# Altium PCB Flight_Controller_2.PcbDoc
Units mm, origin at the board's own origin, x right, y up, seen from the top; angles counter-clockwise.
Board outline 36 x 36 mm, 2 copper layers (Top Layer, Bottom Layer); 41 components, 37 nets, 192 pads, 76 vias.
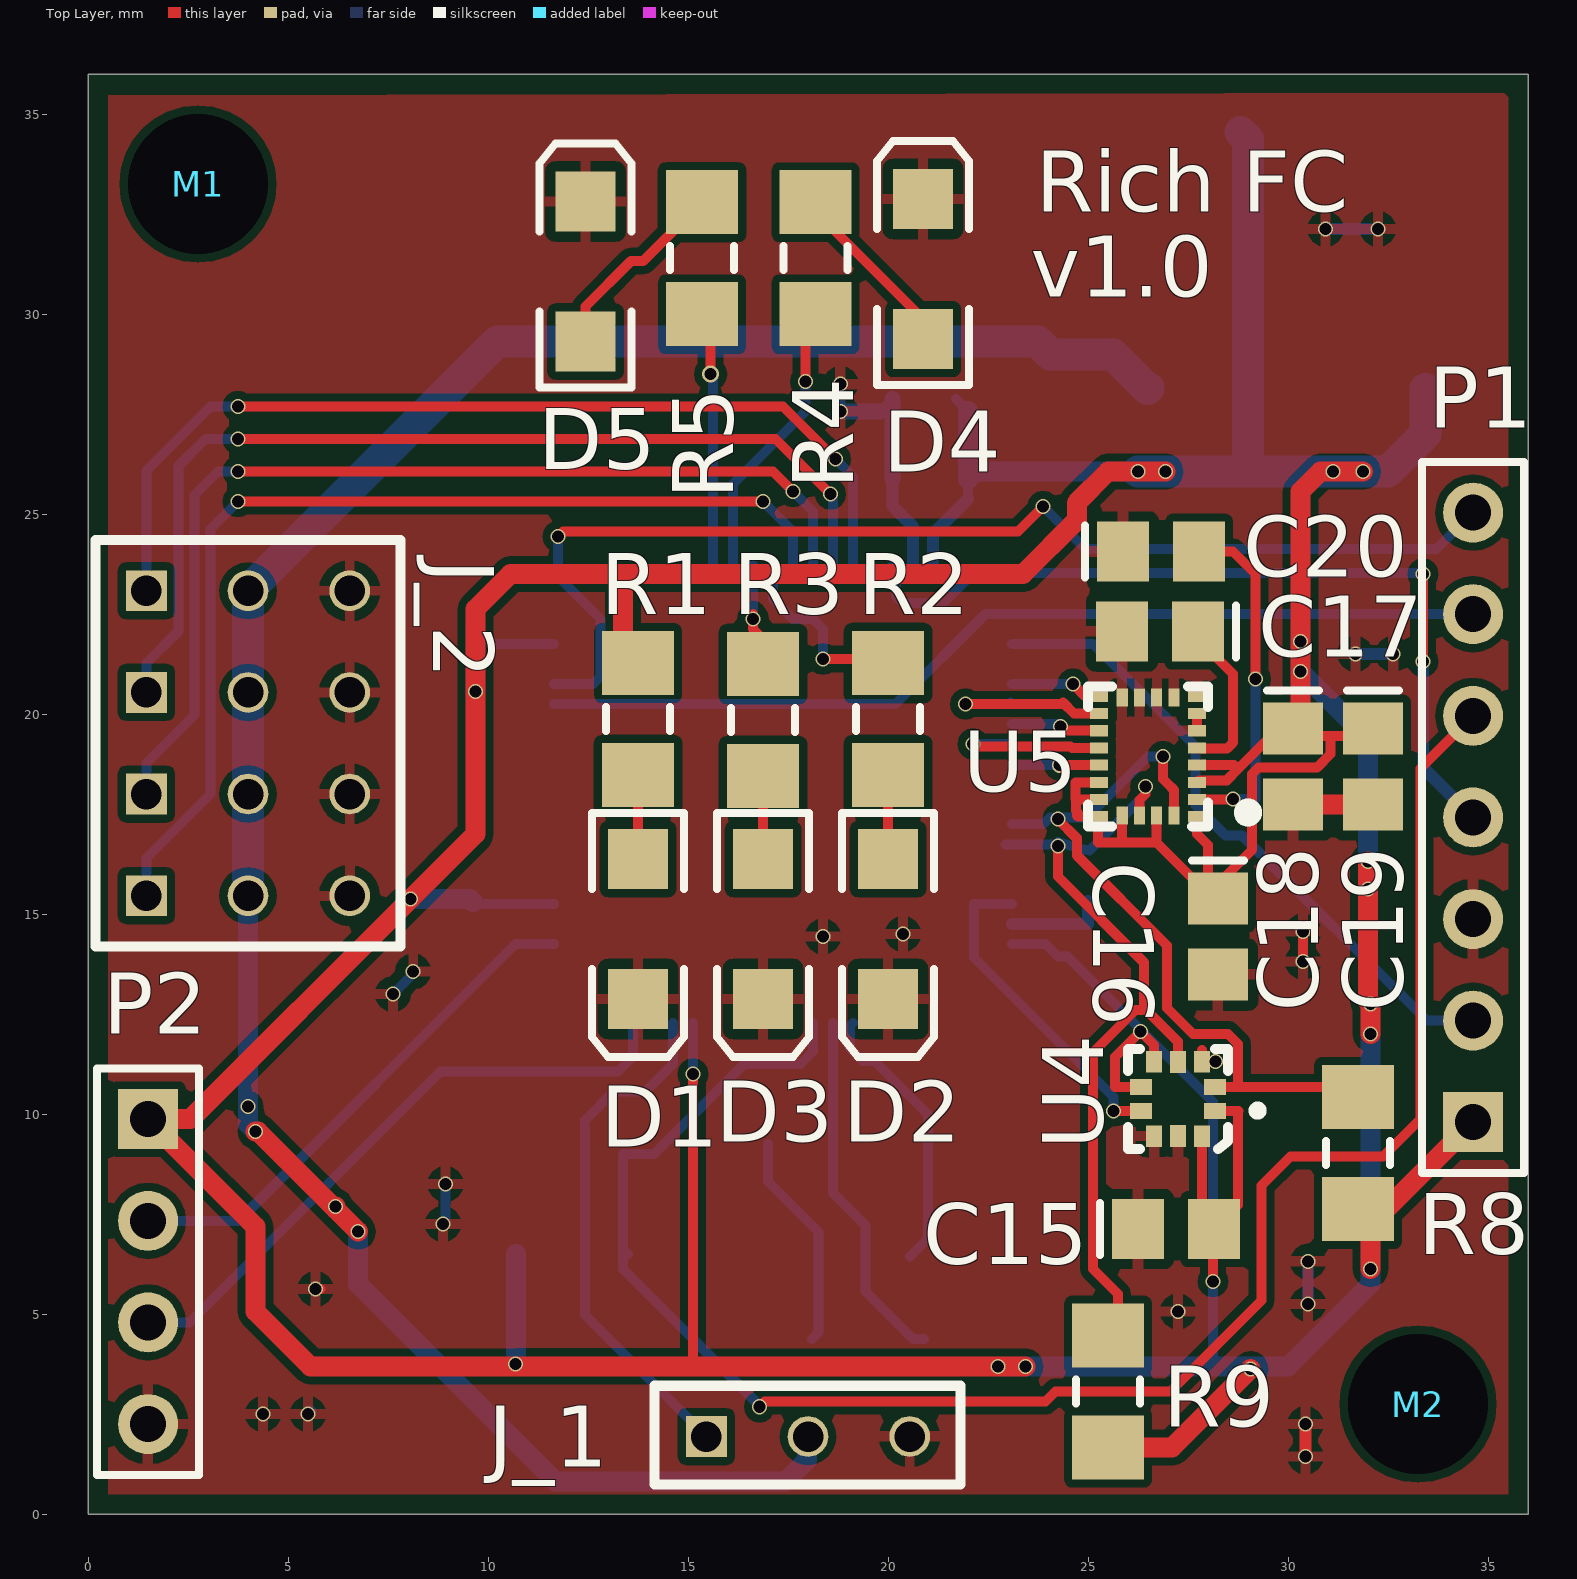
[diagram p0: Top Layer view]
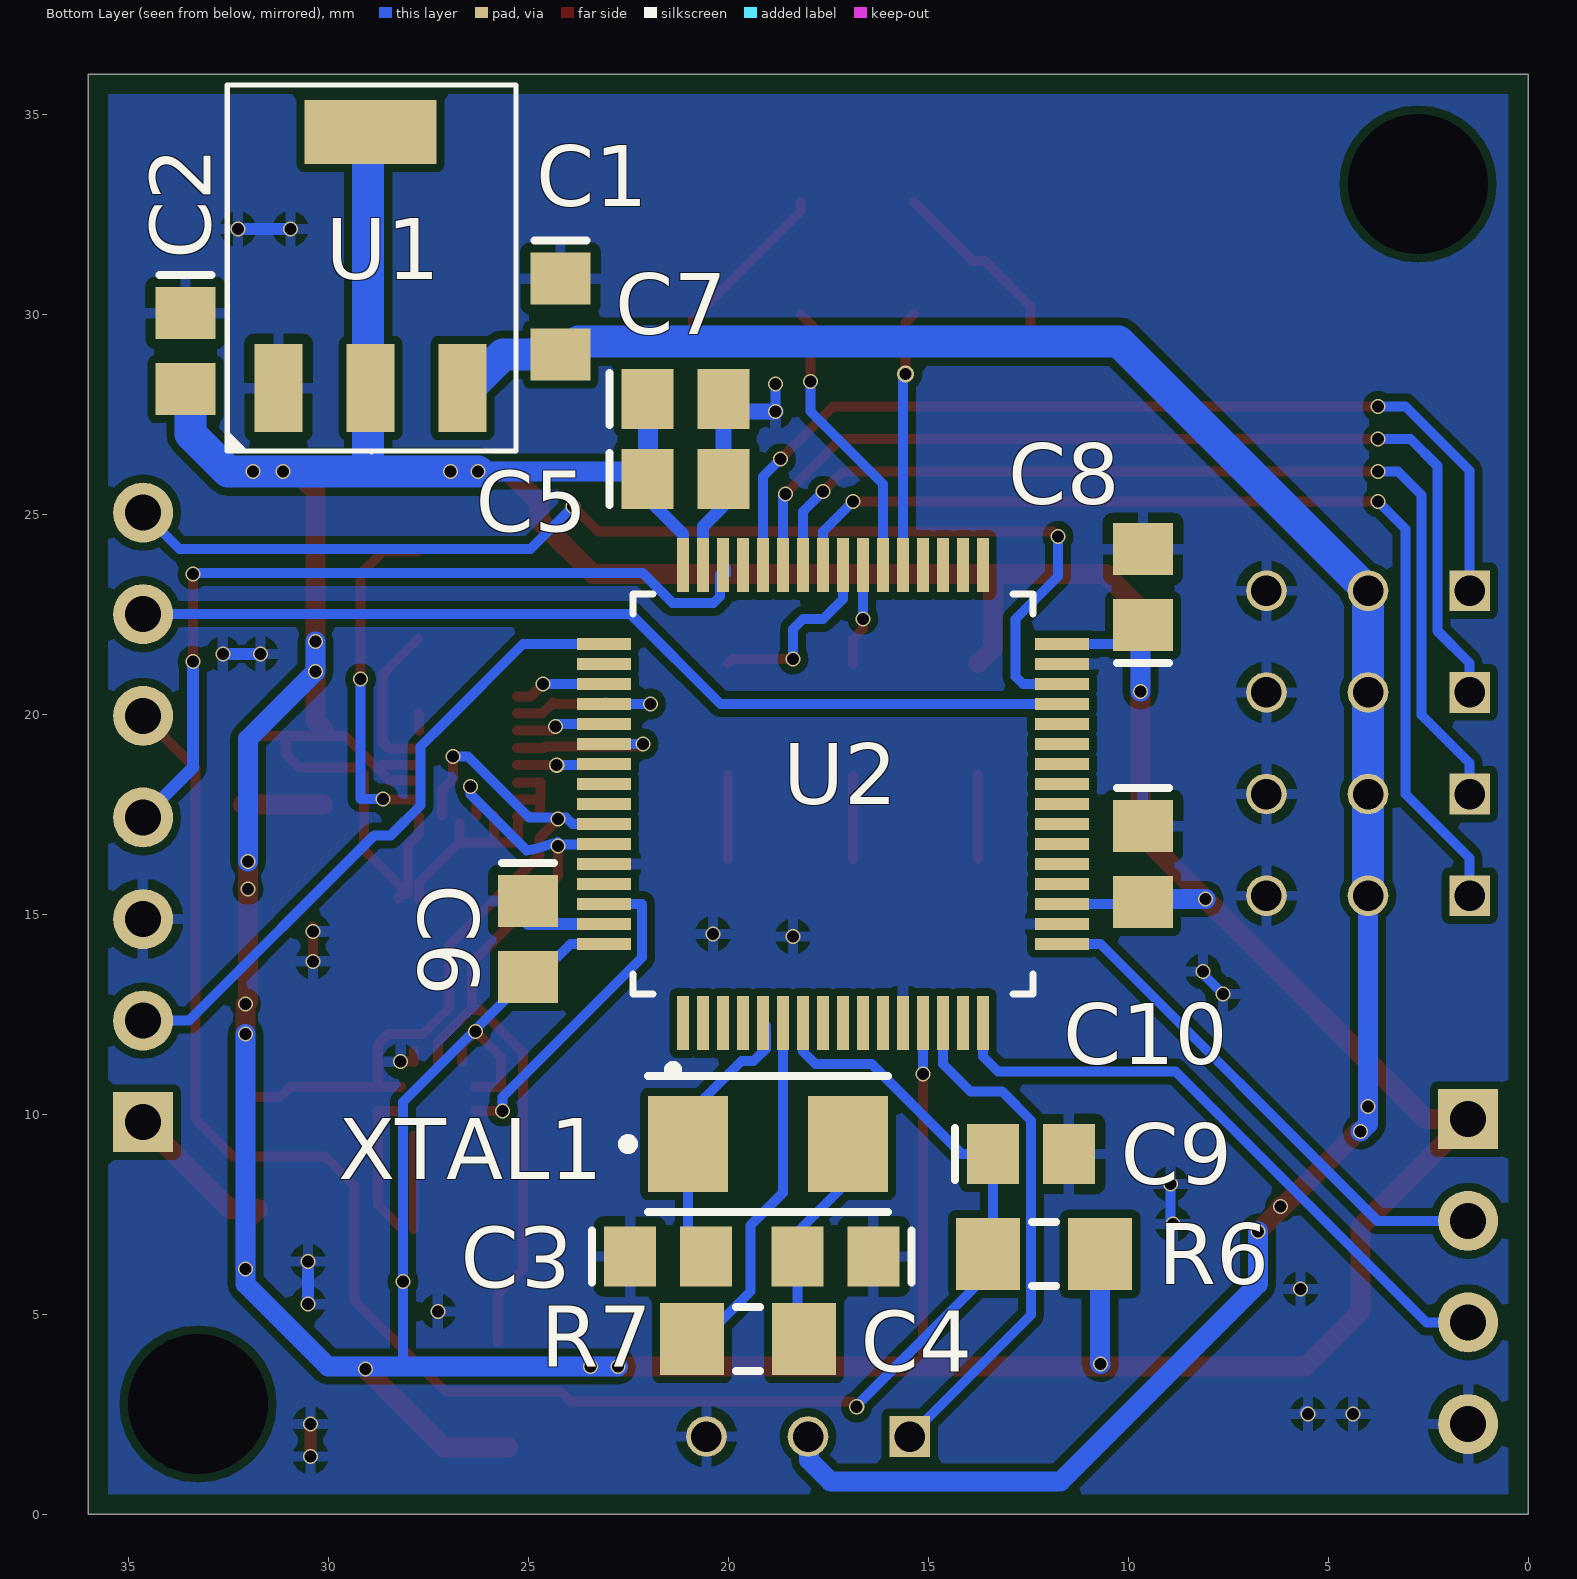
[diagram p1: Bottom Layer view, seen from below]
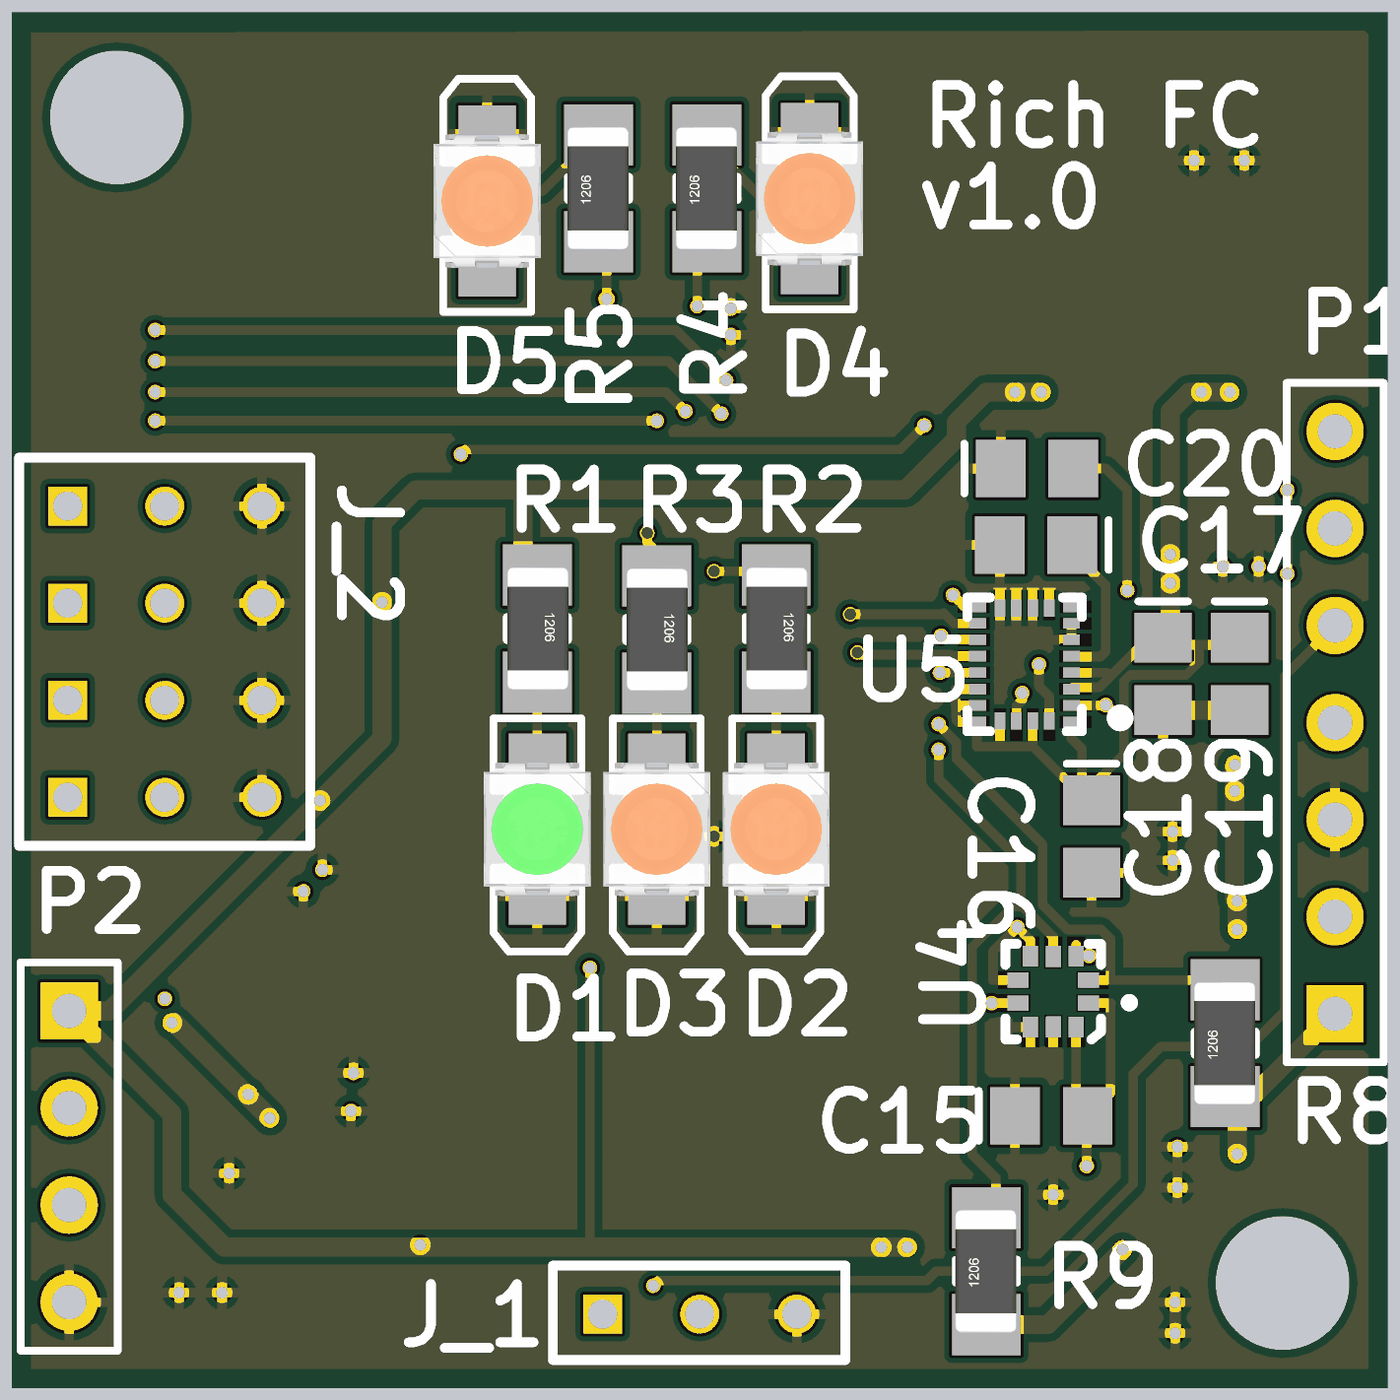
[diagram p2: 3D render of the assembled board from above, using the file's embedded part models]

## Layer stack, top to bottom
Top Solder: solder mask 0.0102, Solder Resist, Dk 3.5
Top Layer: signal copper 0.0356
Dielectric 1: dielectric 0.32, FR-4, Dk 4.8
Bottom Layer: signal copper 0.0356
Bottom Solder: solder mask 0.0102, Solder Resist, Dk 3.5

## Board outline
0,0 36,0 36,36 0,36

## Design rules (kind name [scope] priority, off if disabled: settings)
BoardOutlineClearance [(OnLayer('Top Layer') OR OnLayer('Bottom Layer') OR OnLayer('Multi-Layer'))] p1: gap=0.381 ignorepadtopadclearanceinfootprint=FALSE
Clearance Clearance_Polygon [InPolygon and InNet('GND')] p1: gap=0.2 ignorepadtopadclearanceinfootprint=FALSE
Clearance [All] p2: gap=0.152 ignorepadtopadclearanceinfootprint=FALSE except(0.254: Fill-Fill Fill-Poly Fill-Region Poly-Poly Poly-Region Region-Region)
HoleSize [All] p1: absolutevalues=TRUE maxlimit=4 minlimit=0.025 maxpercent=80.000 minpercent=20.000
MinimumSolderMaskSliver [All] p1: minsoldermaskwidth=0.102
PolygonConnect [All] p1: connectstyle=Relief reliefconductorwidth=0.254 reliefentries=4 polygonreliefangle="90 Angle" airgapwidth=0.254
RoutingVias [All] p1: holewidth=0.305 width=0.381 viastyle="Through Hole" minholewidth=0.254 minwidth=0.381 maxholewidth=0.6 maxwidth=1
SolderMaskExpansion [All] p1: expansion=0.08
Width [All] p1: maxlimit=1 minlimit=0.25 preferedwidth=0.25
28 further rules are at their usual default settings.

## Components (designator, comment, footprint, x,y, rotation, side; value= is the part's Value field where it differs from the comment)
C1 "Cap" C0805 24.187,29.937 r270 bottom
C2 "Cap" C0805 33.562,29.075 r270 bottom value=10uF
C3 "Cap" C0805 21.5,6.438 r180 bottom value=8pF
C4 "Cap" C0805 17.313,6.438 r0 bottom value=8pF
C5 "Cap" C0805 21.062,25.875 r180 bottom value=100nF
C6 "Cap" C0805 25,14.375 r270 bottom value=100nF
C7 "Cap" C0805 21.062,27.875 r180 bottom value=4.7uF
C8 "Cap" C0805 9.625,23.175 r90 bottom value=100nF
C9 "Cap" C0805 12.425,9 r180 bottom value=100nF
C10 "Cap" C0805 9.625,16.25 r270 bottom value=100nF
C15 "Cap" C0805 27.2,7.125 r0 top value=100nF
C16 "Cap" C0805 28.25,14.437 r270 top
C17 "Cap" C0805 26.8,22.062 r180 top
C18 "Cap" C0805 30.125,18.687 r270 top
C19 "Cap" C0805 32.125,18.687 r270 top value=10uF
C20 "Cap" C0805 26.825,24.062 r0 top value=100nF
D1 "OVS5MGBCR4" OVS5MGBCR4 13.75,14.625 r270 top
D2 "OVS5MRBCR4" OVS5MRBCR4 20,14.625 r270 top
D3 "OVS5MRBCR4" OVS5MRBCR4 16.875,14.625 r270 top
D4 "OVS5MRBCR4" OVS5MRBCR4 20.875,31.125 r90 top
D5 "OVS5MRBCR4" OVS5MRBCR4 12.438,31.062 r90 top
J_1 "Header_3x1" Header_3x1 15.46,1.937 r90 top
J_2 "Header 4x3" Header_4x3 4,18 r0 top
M1 "M3_Mounting_Hole" M3_Mounting_Hole 2.75,33.25 r0 top
M2 "M3_Mounting_Hole" M3_Mounting_Hole 33.25,2.75 r0 top
P1 "Header 7" HDR1X7 34.625,9.795 r90 top
P2 "Header 4" HDR1X4 1.5,9.87 r270 top
R1 "Res" 3216[1206] 13.75,19.875 r270 top value=1K
R2 "Res" 3216[1206] 20,19.875 r270 top value=1K
R3 "Res" 3216[1206] 16.875,19.85 r270 top value=1K
R4 "Res" 3216[1206] 18.187,31.395 r90 top
R5 "Res" 3216[1206] 15.35,31.395 r90 top value=1K
R6 "Res" 3216[1206] 12.1,6.5 r180 bottom
R7 "Res" 3216[1206] 19.5,4.375 r180 bottom value=640
R8 "Res" 3216[1206] 31.75,9.025 r90 top value=10k
R9 "Res" 3216[1206] 25.5,3.063 r90 top value=10k
U1 "U_AZ1117EH-3.3TRG1" SOT223 28.937,31.125 r180 bottom
U2 "STM32F072RB_PINOUT" "LQFP-64 10X10MM" 17.375,18 r180 bottom
U4 "LPS25HB" "HLGA-10L - NARROW" 27.25,10.375 r180 top
U5 "LSM9DS1" "LGA-24 - NARROW" 26.5,18.937 r270 top
XTAL1 "NX5032GA 32MHz" NX5032GA 19,9.25 r180 bottom

## Footprints (in the part's own frame and the unit in brackets; to place one, negate y for a bottom-side part, rotate by r counter-clockwise, add the part's x,y. Pads: shape width x height; smd on the part's side, far side on the other; paste and mask are expansions set on the pad)
3216[1206] [mm] "Chip Resistor; Body 3.2 x 1.6 mm (LxW typ)"
  rect 1.6x1.8 smd: 1(-1.4,0) 2(1.4,0)
  silkscreen extent -0.3,-0.8 0.3,0.8, body extent -1.6,-0.79 1.6,0.81, height 1
C0805 [mm] "Chip Capacitor; Body 2.0 x 1.2 mm (LxW typ)"
  rect 1.3x1.5 smd: 1(-0.95,0) 2(0.95,0)
  silkscreen extent -1.9,-0.65 -1.9,0.65
HDR1X4 [mm] "Connector; Header; 4 Position"
  rect 1.5x1.5 hole 0.9: 1(0,0)
  round 1.5 hole 0.9: 2(2.54,0) 3(5.08,0) 4(7.62,0)
  silkscreen extent -1.27,-1.27 8.89,1.27
HDR1X7 [mm] "Connector; Header; 7 Position"
  rect 1.5x1.5 hole 0.9: 1(0,0)
  round 1.5 hole 0.9: 2(2.54,0) 3(5.08,0) 4(7.62,0) 5(10.16,0) 6(12.7,0) 7(15.24,0)
  silkscreen extent -1.27,-1.27 16.51,1.27
Header_3x1 [mil]
  rect 40x40 hole 30: 1(0,0)
  round 40 hole 30: 2(0,-100) 3(0,-200)
  silkscreen extent -47,-250 50,51
Header_4x3 [mil]
  rect 40x40 hole 30: 1(-100,200) 2(-100,100) 3(-100,0) 4(-100,-100)
  round 40 hole 30: 5(0,200) 6(0,100) 7(0,0) 8(0,-100) 9(100,200) 10(100,100) 11(100,0) 12(100,-100)
  silkscreen extent -150,-150 150,250
"HLGA-10L - NARROW" [mm]
  rect 0.55x0.4 smd mask+0: 1(-0.92,0.3) 2(-0.92,-0.3) 6(0.92,-0.3) 7(0.92,0.3)
  rect 0.4x0.54 smd mask+0: 3(-0.6,-0.93) 5(0.6,-0.93) 8(0.6,0.93) 10(-0.6,0.93)
  rect 0.4x0.55 smd mask+0: 4(0,-0.92) 9(0,0.92)
  silkscreen extent -2.09,-1.25 1.25,1.25, body extent -1.25,-1.25 1.25,1.25, height 1
"LGA-24 - NARROW" [mm]
  rect 0.278x0.45 smd mask+0: 1(1.505,1.225) 6(1.505,-1.225) 7(1.075,-1.225) 8(0.645,-1.225) 9(0.215,-1.225) 10(-0.215,-1.225) 11(-0.645,-1.225) 12(-1.075,-1.225) 13(-1.505,-1.225) 18(-1.505,1.225) 19(-1.075,1.225) 20(-0.645,1.225) 21(-0.215,1.225) 22(0.215,1.225) 23(0.645,1.225) 24(1.075,1.225)
  rect 0.45x0.278 smd mask+0: 2(1.475,0.645) 3(1.475,0.215) 4(1.475,-0.215) 5(1.475,-0.645) 14(-1.475,-0.645) 15(-1.475,-0.215) 16(-1.475,0.215) 17(-1.475,0.645)
  silkscreen extent -1.75,-1.5 1.75,2.6, body extent -1.75,-1.5 1.75,1.5, height 1
"LQFP-64 10X10MM" [mm] "LQFP-64 10x10mm 0.5mm pitch"
  rect 0.29x1.35 smd mask+0.054: 1(-3.75,-5.725) 2(-3.25,-5.725) 3(-2.75,-5.725) 4(-2.25,-5.725) 5(-1.75,-5.725) 6(-1.25,-5.725) 7(-0.75,-5.725) 8(-0.25,-5.725) 9(0.25,-5.725) 10(0.75,-5.725) 11(1.25,-5.725) 12(1.75,-5.725) 13(2.25,-5.725) 14(2.75,-5.725) 15(3.25,-5.725) 16(3.75,-5.725) 33(3.75,5.725) 34(3.25,5.725) 35(2.75,5.725) 36(2.25,5.725) 37(1.75,5.725) 38(1.25,5.725) 39(0.75,5.725) 40(0.25,5.725) 41(-0.25,5.725) 42(-0.75,5.725) 43(-1.25,5.725) 44(-1.75,5.725) 45(-2.25,5.725) 46(-2.75,5.725) 47(-3.25,5.725) 48(-3.75,5.725)
  rect 1.35x0.29 smd mask+0.054: 17(5.725,-3.75) 18(5.725,-3.25) 19(5.725,-2.75) 20(5.725,-2.25) 21(5.725,-1.75) 22(5.725,-1.25) 23(5.725,-0.75) 24(5.725,-0.25) 25(5.725,0.25) 26(5.725,0.75) 27(5.725,1.25) 28(5.725,1.75) 29(5.725,2.25) 30(5.725,2.75) 31(5.725,3.25) 32(5.725,3.75) 49(-5.725,3.75) 50(-5.725,3.25) 51(-5.725,2.75) 52(-5.725,2.25) 53(-5.725,1.75) 54(-5.725,1.25) 55(-5.725,0.75) 56(-5.725,0.25) 57(-5.725,-0.25) 58(-5.725,-0.75) 59(-5.725,-1.25) 60(-5.725,-1.75) 61(-5.725,-2.25) 62(-5.725,-2.75) 63(-5.725,-3.25) 64(-5.725,-3.75)
  silkscreen extent -5,-7 5,5, body extent -6,-6 6,6, height 1.55
M3_Mounting_Hole [mm]
  round 1 hole 3.5 unplated mask+0: 0(0,0)
  body extent -3,-3 3,3, height 3
NX5032GA [mm] "NX5032GA Crystal Oscillator"
  rect 2x2.4 smd: 1(-2,0) 2(2,0)
  silkscreen extent -3.63,-1.7 3,1.7, body extent -2.51,-1.6 2.51,1.6, height 1.3
OVS5MGBCR4 [mm] "SMT LED; 2 Flat Leads; GREEN"
  rect 1.5x1.5 smd: 1(-1.75,0) 2(1.75,0)
  silkscreen extent -2.9,-1.15 3.2,1.15, body extent -1.75,-1.4 1.75,1.4, height 1.6
OVS5MRBCR4 [mm] "SMT LED; 2 Flat Leads; RED"
  rect 1.5x1.5 smd: 1(-1.75,0) 2(1.75,0)
  silkscreen extent -2.9,-1.15 3.2,1.15, body extent -1.75,-1.4 1.75,1.4, height 1.6
SOT223 [mm]
  rect 1.2x2.2 smd: 1(-2.3,-2.975) 2(0,-2.975) 3(2.3,-2.975)
  rect 3.3x1.6 smd: 4(0,3.425)
  silkscreen extent -3.58,-4.57 3.63,4.6, body extent -3.33,-2.93 3.43,3.86, height 1.3

## Part data
C1 C2 C3 C4 C5 C6 C7 C8 C9 C10 C15 C16 C17 C18 C19 C20: "Capacitor"
  C2 C3 C4 C5 C6 C7 C8 C9 C10 C15 C19 C20: LatestRevisionDate=17-Jul-2002, LatestRevisionNote="Re-released for DXP Platform.", PackageReference=C1206, Published=8-Jun-2000, Publisher="Altium Limited"
D1: "Typical GREEN LED", Colour=GREEN, PackageDocument=Feb-2002, Supplier Part Number 1=365-1545-1-ND, LatestRevisionDate=17-Jul-2002, LatestRevisionNote="Re-released for DXP Platform.", PackageReference=3.2X1.6X1.1, Published=8-Jun-2000, Publisher="Altium Limited", Supplier 1=Digi-Key
D2 D3 D4 D5: "Typical RED LED", Colour=RED, PackageDocument=Feb-2002, Supplier Part Number 1=365-1546-1-ND, LatestRevisionDate=17-Jul-2002, LatestRevisionNote="Re-released for DXP Platform.", PackageReference=3.2X1.6X1.1, Published=8-Jun-2000, Publisher="Altium Limited", Supplier 1=Digi-Key
J_2: library part Header_4x3
P1: "Header, 7-Pin", LatestRevisionDate=17-Jul-2002, LatestRevisionNote="Re-released for DXP Platform.", Publisher="Altium Limited"
P2: "Header, 4-Pin", LatestRevisionDate=17-Jul-2002, LatestRevisionNote="Re-released for DXP Platform.", Publisher="Altium Limited"
R1 R2 R3 R4 R5 R6 R7 R8 R9: "Surface Mount Resistor"
  R1 R2 R3 R5 R7 R8 R9: LatestRevisionDate=17-Jul-2002, LatestRevisionNote="Re-released for DXP Platform.", PackageReference=AXIAL-0.5, Published=8-Jun-2000, Publisher="Altium Limited"
U1: "IC LDO 3.3V 1A", Current - Limit (Min)=-, Current - Output=1A, Manufacturer="Diodes Incorporated", Manufacturer Part Number=AZ1117EH-3.3TRG1, Operating Temperature="-40°C ~ 125°C", Package / Case="TO-261-4, TO-261AA", Supplier Device Package=SOT-223, Supplier Part Number 1=AZ1117EH-3.3TRG1DICT-ND, Voltage - Dropout (Typical)="1.1V @ 1A", Voltage - Input="Up to 13V", Voltage - Output=3.3V, Category="Integrated Circuits (ICs)", ComponentLink1Description=http://www.diodes.com/_files/datasheets/AZ1117E.pdf, ComponentLink1URL=http://www.diodes.com/_files/datasheets/AZ1117E.pdf, Mounting Type="Surface Mount", Number of Regulators=1, Packaging="Cut Tape (CT)", Pricing="1=0.61, 10=0.456, 100=0.2578, 500=0.1709, 1000=0.13108 (CAD)", Regulator Topology="Positive Fixed", RoHS="RoHS Compliant", Stock 1=13427, Supplier 1=Digi-Key
U2: "64-LQFP - Pinout Representation", Supplier Part Number 1=497-14644-ND, Supplier 1=Digi-Key
U4: Manufacturer=STMicroelectronics, Manufacturer Part Number=LPS25HBTR, Max Operating Temperature=105, Max Supply Voltage=3.6, Min Operating Temperature=-30, Min Supply Voltage=1.7, Operating Pressure=18.27, Supplier Part Number 1=497-15070-6-ND, ComponentLink1Description=http://www.farnell.com/datasheets/1992925.pdf, ComponentLink1URL=http://www.farnell.com/datasheets/1992925.pdf, ComponentLink2Description=http://www.st.com/st-web-ui/static/active/en/resource/technical/document/datasheet/DM00141379.pdf, ComponentLink2URL=http://www.st.com/st-web-ui/static/active/en/resource/technical/document/datasheet/DM00141379.pdf, Contact Plating=Nickel,Gold, Lead Free="Lead Free", Max Pressure=290.08, Mount="Surface Mount", Number of Pins=10, Port Style="No Port", Pricing 1="1=3.25, 10=2.917, 100=2.3901 (USD)", REACH SVHC="No SVHC", Stock 1=0, Supplier 1=Digikey, Termination=Solder
U5: Case/Package=LGA, Manufacturer=STMicroelectronics, Manufacturer Part Number=LSM9DS1TR, Max Operating Temperature=85, Max Supply Voltage=3.6, Min Operating Temperature=-40, Min Supply Voltage=1.9, Supplier Part Number 1=497-14946-6-ND, ComponentLink1Description=http://www.farnell.com/datasheets/2028150.pdf, ComponentLink1URL=http://www.farnell.com/datasheets/2028150.pdf, Lead Free="Lead Free", Number of Pins=24, Packaging="Cut Tape", Pricing 1="1=6.4, 10=5.751, 100=4.7119 (USD)", REACH SVHC="No SVHC", Stock 1=6141, Supplier 1=Digikey
XTAL1: library part NX5032GA, "NX5032GA"

## Via types
v1: diameter 0.381, hole 0.305, Top Layer to Bottom Layer, 75 vias
v2: diameter 0.432, hole 0.305, Top Layer to Bottom Layer, 1 vias

## Nets (pads, with @x,y where several pads share a name; then routed paths per layer and width w, separated by ;. In a path a pad name is that pad's centre, name@x,y a point inside that pad or via, vN(x,y) a via of type N, cw(c..) or ccw(c..) an arc to the next point about the centre after c; other vN are vias at no path point)
5V: C1.2 J_1.2 J_2.5 J_2.6 J_2.7 J_2.8 U1.3 | length 57.9
  Top Layer w0.5: v1(4.187,9.563) 4.25,9.563 v1@6.188,7.625 ; v1(6.188,7.688) v1@6.188,7.625 ; v1(6.75,7.063) v1@6.188,7.625
  Bottom Layer w0.5: J_2.8 v1(4,10.188) 4,9.75 v1(4.187,9.563) ; v1(6.75,7.063) 6.75,5.75 11.688,0.813 17.437,0.813 17.975,1.35 J_1.2@17.975,1.6
  Bottom Layer w0.8: J_2.8 J_2.7 J_2.6 J_2.5 10.232,29.312 23.737,29.312 24.062,28.987 C1.2 25.625,28.987 26.487,28.125 U1.3@26.512,28.15
DEN_A/G: U2.51 U5.13 | length 2.3
  Top Layer w0.25: v1(24.625,20.75) 24.933,20.442 U5.13
  Bottom Layer w0.25: U2.51 v1(24.625,20.75)
DRDY_B: U2.62 U4.7 | length 8.3
  Top Layer w0.25: v1(25.637,10.075) U4.7
  Bottom Layer w0.25: U2.62 22.148,15.25 22.148,13.915 25.637,10.425 v1(25.637,10.075)
DRDY_M: U2.55 U5.9 | length 2.2
  Top Layer w0.25: v1(24.285,18.722) U5.9
  Bottom Layer w0.25: U2.55 23.127,18.722 v1(24.285,18.722)
GND: C1.1 C2.1 C3.1 C4.1 C5.2 C6.1 C7.2 C8.2 C9.2 C10.1 C15.1 C16.2 C17.2 C18.2 C19.2 C20.1 D1.2 D2.2 D3.2 D4.2 D5.2 J_1.3 J_2.9 J_2.10 J_2.11 J_2.12 P1.3 P2.4 U1.1 U2.12 U2.18 U2.31 U2.47 U2.60 U2.63 U4.3 U4.8 U4.9 U5.14 U5.15 U5.16 U5.17 U5.18 U5.19 U5.20 | length 19
  Top Layer w0.25: v1(5.687,5.625) v1@5.813,5.625 ; U5.20 U5.19 ; 27.85,11.6 U4.3 27.857,11.312 v1(28.188,11.312) ; v1(30.375,13.812) v1(30.375,14.563) v1@30.375,14.687
  Top Layer w0.3: v1(30.438,1.438) v1(30.438,2.25)
  Top Layer w0.5: C18.2 C19.2
  Bottom Layer w0.25: v1(7.625,13) 8.127,13.502 v1(8.127,13.564) ; v1(8.875,7.25) 8.938,7.313 v1(8.938,8.25) ; v1(18.812,27.563) v1(18.812,28.25) ; C7.2@19.8,27.563 C7.2
  Bottom Layer w0.3: v1(5.5,2.5) v1@5.563,2.562 ; C5.2 20.112,25.2 20.625,24.688 U2.47 ; U2.63 25,14.75 C6.1 ; v1(30.5,5.25) v1(30.5,6.312) ; v1(30.937,32.125) v1(32.25,32.125) ; v1(31.688,21.5) v1(32.625,21.5)
  Bottom Layer w0.4: v1(18.812,27.563) C7.2@19.8,27.563 ; C5.2 C7.2
  other v1: 4.375,2.5 27.25,5.062 18.375,14.437 20.375,14.5
INT1_A/G: U2.53 U5.11 | length 2.2
  Top Layer w0.25: v1(24.312,19.687) 24.407,19.593 25.265,19.593 U5.11
  Bottom Layer w0.25: U2.53 24.249,19.75 v1(24.312,19.687)
INT2_A/G: U2.52 U5.12 | length 4.7
  Top Layer w0.25: v1(21.937,20.25) 24.346,20.25 24.379,20.282 24.649,20.012 U5.12
  Bottom Layer w0.25: v1(21.937,20.25) 23.035,20.25 23.068,20.282 U2.52
INT_M: U2.54 U5.10 | length 4.2
  Top Layer w0.25: v1(22.125,19.25) 22.185,19.19 24.56,19.19 24.597,19.152 U5.10
  Bottom Layer w0.25: v1(22.125,19.25) U2.54
LED1: R2.1 U2.40 | length 4.8
  Top Layer w0.25: v1(18.375,21.375) 19.9,21.375 R2.1
  Bottom Layer w0.25: U2.40 17.125,22.875 17.625,22.375 18.125,22.375 18.375,22.125 v1(18.375,21.375)
LED2: R3.1 U2.39 | length 2.6
  Top Layer w0.25: v1@16.625,22.5 v1(16.625,22.375) 16.625,22.125 16.875,21.875 R3.1
  Bottom Layer w0.25: v1@16.625,22.5 U2.39
LED3: R4.1 U2.38 | length 7.2
  Top Layer w0.25: v1(17.938,28.313) 17.938,29.62 17.875,29.682 R4.1
  Bottom Layer w0.25: U2.38 16.125,25.75 17.938,27.563 v1(17.938,28.313)
LED4: R5.1 U2.37 | length 6.4
  Top Layer w0.25: R5.1 15.563,29.783 v2(15.563,28.5)
  Bottom Layer w0.25: v2(15.563,28.5) 15.625,28.438 U2.37
NetC4_2: C4.2 R7.2 XTAL1.2 | length 5.5
  Bottom Layer w0.25: XTAL1.2 17,8.312 18.263,7.05 C4.2 18.263,4.538 R7.2
NetC17_1: C17.1 U5.21 | length 3.9
  Top Layer w0.25: U5.21 27.739,19.139 28.479,19.139 28.625,19.285 28.625,21 C17.1@27.75,21.875
NetC20_2: C20.2 U5.24 | length 8.6
  Top Layer w0.25: U5.24 v1@28.5,17.862 ; C20.2 28.625,24.062 29.187,23.5 v1(29.187,20.875)
  Bottom Layer w0.25: v1(28.625,17.875) 29.187,17.875 v1(29.187,20.875)
NetD1_1: D1.1 R1.2 | length 2.1
  Top Layer w0.25: D1.1 R1.2
NetD2_1: D2.1 R2.2 | length 2.1
  Top Layer w0.25: D2.1 R2.2
NetD3_1: D3.1 R3.2 | length 2.1
  Top Layer w0.25: D3.1 R3.2
NetD4_1: D4.1 R4.2 | length 4.5
  Top Layer w0.25: R4.2 18.187,32.563 20.875,29.875 D4.1
NetD5_1: D5.1 R5.2 | length 4.9
  Top Layer w0.25: D5.1 12.438,30.188 13.57,31.32 13.875,31.32 R5.2
NetP1_2: P1.2 U2.49 | length 16.3
  Bottom Layer w0.25: U2.49 25.125,21.75 27.097,19.778 27.688,19.187 27.688,17.713 28.431,16.969 28.843,16.969 33.478,12.335 P1.2
NetP1_4: P1.4 U2.46 | length 21.1
  Top Layer w0.25: v1(33.375,21.312) v1(33.375,23.5)
  Bottom Layer w0.25: U2.46 20.047,23.647 20.047,23.5 20.203,23.5 20.203,22.935 20.365,22.773 21.385,22.773 22.135,23.522 v1@33.375,23.522
  Bottom Layer w0.3: v1(33.375,21.312) 33.375,18.665 P1.4
OSC_IN: C3.2 U2.5 XTAL1.1 | length 7
  Bottom Layer w0.25: U2.5 19.047,12.197 19.047,11.64 19.365,11.323 19.662,11.323 21,9.985 XTAL1.1 21,6.888 C3.2
OSC_OUT: R7.1 U2.6 | length 9
  Bottom Layer w0.25: U2.6 18.625,8.03 19.437,7.217 19.437,5.562 20.625,4.375 R7.1
PB10: P1.6 U2.29 | length 23.9
  Bottom Layer w0.25: U2.29 20.188,20.25 22.433,22.495 P1.6
PB11: P1.7 U2.30 | length 29.2
  Top Layer w0.25: v1(11.75,24.438) 11.875,24.563 23.25,24.563 v1(23.875,25.188)
  Bottom Layer w0.25: U2.30 12.625,20.75 12.812,20.937 12.812,22.375 11.75,23.437 v1(11.75,24.438) ; v1(23.875,25.188) 24.938,24.125 33.715,24.125 P1.7
PPM_IN: J_1.1 U2.14 | length 13
  Bottom Layer w0.25: U2.14 14.625,11.25 13.938,10.563 13.145,10.563 12.423,9.84 12.423,4.975 J_1.1
PWM_1: J_2.1 U2.44 | length 24.3
  Top Layer w0.25: v1(3.75,27.688) 17.375,27.688 v1(18.687,26.375)
  Bottom Layer w0.25: J_2.1 1.46,26.085 3.063,27.688 v1(3.75,27.688) ; v1(18.687,26.375) 19.125,25.938 U2.44
PWM_2: J_2.2 U2.43 | length 24.9
  Top Layer w0.25: v1(3.75,26.875) 17.187,26.875 v1(18.563,25.5)
  Bottom Layer w0.25: J_2.2 1.46,21.273 2.258,22.07 2.258,26.195 2.937,26.875 v1(3.75,26.875) ; v1(18.563,25.5) 18.625,25.438 U2.43
PWM_3: J_2.3 U2.42 | length 25.4
  Top Layer w0.25: v1(3.75,26.063) 17.125,26.063 v1(17.625,25.562)
  Bottom Layer w0.25: J_2.3 1.46,18.772 2.66,19.973 2.66,25.473 3.25,26.063 v1(3.75,26.063) ; v1(17.625,25.562) 18.125,25.063 U2.42
PWM_4: J_2.4 U2.41 | length 25.8
  Top Layer w0.25: v1(3.75,25.312) v1(16.875,25.312)
  Bottom Layer w0.25: J_2.4 1.46,16.397 3.063,18 3.063,24.625 v1(3.75,25.312) ; v1(16.875,25.312) 17.625,24.563 U2.41
RESET: C9.1 P1.5 R6.1 U2.7 | length 46.2
  Top Layer w0.25: v1(16.785,2.68) 16.917,2.812 23.937,2.812 24.188,3.063 27.063,3.063 29.34,5.34 29.34,8.215 30.063,8.938 32.375,8.938 33.312,9.875 33.312,18.642 P1.5
  Bottom Layer w0.25: R6.1 R6.1@13.375,6.625 ; v1@16.803,2.697 13.375,6.125 R6.1@13.375,6.625 ; U2.7 18.125,11.563 17.812,11.25 16.408,11.25 14.158,9 C9.1 R6.1@13.375,6.625
RF_COM_RX: P2.3 U2.16 | length 15.7
  Bottom Layer w0.25: P2.3 2.54,4.79 8.813,11.063 13.25,11.063 13.625,11.437 U2.16
RF_COM_TX: P2.2 U2.17 | length 13
  Bottom Layer w0.25: P2.2 3.768,7.33 10.687,14.25 U2.17
SENSOR_SCL: R8.2 U2.58 U4.2 U5.2 | length 18.8
  Top Layer w0.25: v1(24.25,17.375) 24.25,17.364 24.718,16.896 24.718,16.47 26.973,14.215 26.973,12.654 27.626,12 27.681,12 27.683,12.002 28.017,12.002 28.019,12 28.5,12 28.75,11.75 28.75,10.675 ; v1(26.875,18.937) 26.875,18.375 27,18.25 27.145,18.105 U5.2 ; U4.2 28.75,10.675 ; R8.2 31.2,10.425 30.95,10.675 28.75,10.675
  Bottom Layer w0.25: U2.58 23.886,17.25 24.051,17.415 24.977,17.415 26.5,18.938 v1(26.875,18.937)
SENSOR_SDA: R9.2 U2.59 U4.4 U5.4 | length 20.9
  Top Layer w0.25: v1(24.25,16.703) 24.25,15.937 26.404,13.784 26.404,12.654 27.25,11.807 U4.4 ; R9.2@25.75,4.313 25.75,5.5 25.125,6.125 25.125,11.537 26.188,12.6 26.35,12.6 ; U5.4 26.285,17.847 26.438,18 v1(26.438,18.187)
  Bottom Layer w0.25: U2.59@22.935,16.735 v1@24.25,16.735 ; v1@24.25,16.797 24.263,16.795 24.276,16.792 24.894,16.61 25.035,16.59 26.438,17.993 v1(26.438,18.187)
VDD: C2.2 C5.1 C6.2 C7.1 C8.1 C10.2 C15.2 C16.1 C18.1 C19.1 P1.1 P2.1 R1.1 R6.2 R8.1 R9.1 U1.2 U1.4 U2.13 U2.19 U2.32 U2.48 U2.64 U4.1 U4.5 U4.6 U4.10 U5.1 U5.3 U5.5 U5.6 U5.7 U5.8 U5.22 U5.23 | length 199.3
  Top Layer w0.25: 15.125,3.688 v1(15.125,11) ; U5.7 24.7,17.862 ; U5.8 24.687,18.292 24.687,17.875 24.7,17.862 ; U5.5 25.855,16.8 25.84,16.785 ; U4.6 25.675,10.675 25.675,11.425 v1(26.313,12.063) 26.65,11.725 U4.5 ; U5.3@26.715,17.275 26.715,16.785 ; C16.1@27.725,15.35 27.725,15.775 26.715,16.785 ; U5.1 27.725,17 28,16.725 C16.1@28,15.5 ; U5.23 27.775,18.343 28.468,18.343 28.75,18.625 ; U5.22 28.653,18.722 28.75,18.625 ; C15.2@27.85,7.125 U4.10 U4.10@27.85,9.455 ; v1(28.125,5.813) 28.125,7.1 C15.2 28.75,7.725 28.75,10.062 28.762,10.075 U4.1 ; C16.1 28.138,15.5 C16.1@28,15.5 ; C19.1@32.125,19.45 31.063,19.45 ; 24.7,17.862 24.7,17.587 24.718,17.569 24.718,17.47 24.755,17.432 U5.6 25.25,17.408 25.25,16.785 25.84,16.785 ; 25.84,16.785 26.715,16.785 ; C16.1@28,15.5 29.098,16.598 29.098,18.502 29.26,18.665 30.729,18.665 31.063,18.998 31.063,19.45 ; 28.75,18.625 29.575,19.45 31.063,19.45
  Top Layer w0.5: R1.1 13.375,21.65 13.375,23.5 ; v1(23.437,3.688) v1(22.75,3.688) 15.125,3.688 5.562,3.688 4.187,5.062 4.187,7.183 P2.1 2.558,9.87 v1(8.063,15.375) 9.687,17 v1(9.687,20.562) 9.687,22.625 10.563,23.5 13.375,23.5 ; R9.1 27.1,1.663 v1(29.062,3.625) ; v1(26.938,26.063) v1(26.25,26.063) 25.5,26.063 24.719,25.281 24.719,24.844 23.375,23.5 13.375,23.5 ; C18.1 30.312,19.825 v1(30.312,21.063) v1(30.312,21.812) 30.312,25.562 30.813,26.063 v1(31.125,26.063) v1(31.875,26.063) ; v1(32,16.312) v1(32,15.625) 32,12.813 v1(32.063,12.75) 32.062,12.688 v1(32.062,12) ; v1(32.062,6.125) 32.062,7.313 R8.1 32.455,7.625 P1.1
  Bottom Layer w0.25: C10.2 9.675,15.25 U2.19 ; C8.1 9.687,22.162 10.1,21.75 U2.32 ; v1(15.125,11) U2.13 ; C7.1@21.7,27.875 C7.1@22,27.575 ; C5.1@22,25.375 C5.1@22,25.875 ; U2.64 23.938,14.25 24.25,13.938 24.487,13.938 C6.2 28.125,10.3 v1(28.125,5.813) 28.125,3.688
  Bottom Layer w0.3: U2.48 21.125,24.5 C5.1@22,25.375
  Bottom Layer w0.5: v1(8.063,15.375) 9.55,15.375 C10.2 ; v1(9.687,20.562) C8.1@9.687,22.162 ; v1(10.687,3.75) 10.7,3.762 R6.2 ; C7.1@22,27.575 C5.1@22,25.875 ; C5.1 C5.1@22,25.875 ; v1(22.75,3.688) v1(23.437,3.688) 28.125,3.688 30,3.688 32.062,5.75 v1(32.062,6.125) v1(32.062,12) ; v1(26.25,26.063) 22.187,26.063 C5.1@22,25.875 ; v1(30.312,21.812) v1(30.312,21.063) 32,19.375 v1(32,16.312)
  Bottom Layer w0.8: v1(26.25,26.063) v1(26.938,26.063) v1(31.125,26.063) v1(31.875,26.063) 32.5,26.063 33.437,27 C2.2@33.437,28.125 ; U1.4@28.813,34.55 29,34.362 29,26.125
pads on no net: M1.0 M2.0 U2.1 U2.2 U2.3 U2.4 U2.8 U2.9 U2.10 U2.11 U2.15 U2.20 U2.21 U2.22 U2.23 U2.24 U2.25 U2.26 U2.27 U2.28 U2.33 U2.34 U2.35 U2.36 U2.45 U2.50 U2.56 U2.57 U2.61

## Polygon pours and split planes (outlines as drawn)
GND on Bottom Layer "GND_L02_P000" (solid, remove dead copper, pour order 0): 0.5,35.5 0.5,0.5 35.5,0.5 35.5,35.5
GND on Top Layer "GND_L01_P002" (solid, remove dead copper, pour order 2): 0.5,35.469 0.5,0.5 35.5,0.5 35.5,35.53

## Silkscreen, mask and mechanical layers (free items; w line width, h text height)
Top Overlay:
  text "Rich FC" at 23.687,32.563 h1.52
  text "v1.0" at 23.563,30.438 h1.52